# EAGLE board contra1575 (EAGLE 7.5.0)

Size 160 x 100 mm. Coordinates in mm from the lower left corner, seen from the top.
Outline: 0,0 160,0 160,100 0,100 0,0
Copper layers (1*16): Top 0.035mm / dielectric 1.5mm / Bottom 0.035mm
Design rules "default": minimum track width 10mil, minimum drill 24mil, track to track 8mil, track to pad 8mil, pad to pad 8mil, via to via 8mil, smd to smd 8mil, copper to edge 40mil, drill to drill 8mil, minimum pad ring 10mil, minimum via ring 8mil, stop-mask expansion 4mil, vias tented up to drill 0mil, thermal gap 10mil

## Footprints (pad centres in the part's own frame; a part is rotated, then mirrored left to right if it is on the bottom)
5MM_TH = drill 0.7 pad 2.54: 1 -2.5,0; 2 2.5,0
DO35-7 = drill 0.813 pad 2.184: A 3.81,0; C -3.81,0
44PINEDGE = smd 1.905 x 8.255: 1 -41.605,4.826; 2 -37.643,4.826; 3 -33.68,4.826; 4 -29.718,4.826; 5 -25.756,4.826; 6 -21.793,4.826; 7 -17.831,4.826; 8 -13.868,4.826; 9 -9.906,4.826; 10 -5.944,4.826; 11 -1.981,4.826; 12 1.981,4.826; 13 5.944,4.826; 14 9.906,4.826; 15 13.868,4.826; 16 17.831,4.826; 17 21.793,4.826; 18 25.756,4.826; 19 29.718,4.826; 20 33.68,4.826; 21 37.643,4.826; 22 41.605,4.826 | smd 1.905 x 8.255 bottom: A -41.605,4.826; B -37.643,4.826; C -33.68,4.826; D -29.718,4.826; E -25.756,4.826; F -21.793,4.826; H -17.831,4.826; J -13.868,4.826; K -9.906,4.826; L -5.944,4.826; M -1.981,4.826; N 1.981,4.826; P 5.944,4.826; R 9.906,4.826; S 13.868,4.826; T 17.831,4.826; U 21.793,4.826; V 25.756,4.826; W 29.718,4.826; X 33.68,4.826; Y 37.643,4.826; Z 41.605,4.826
TO92 = drill 0.813 octagon: 1 1.27,-1.27; 2 1.27,1.27; 3 -1.27,1.27
TO18 = drill 0.813 pad 1.676: 1 1.905,0; 2 0,1.905; 3 -1.905,0
R_QUARTERWATT = drill 0.813 pad 1.676: 1 -4.5,0; 2 4.5,0
R_HALFWATT = drill 0.9 pad 2.184: 1 -5.85,0; 2 5.85,0
R_ONEWATT = drill 1 pad 2.184: 1 -8,0; 2 8,0
R_TWOWATT = drill 1 pad 2.184: 1 -8.75,0; 2 8.75,0

## Placement (x,y rotation side)
C1  .01uF  [5MM_TH]  -109.22,34.29 0 top  (outside the outline)
C2  .01uF  [5MM_TH]  -17.78,46.99 0 top  (outside the outline)
C3  1000pF  [5MM_TH]  -76.2,34.29 0 top  (outside the outline)
C4  330pF  [5MM_TH]  -87.63,34.29 0 top  (outside the outline)
C5  330pF  [5MM_TH]  -99.06,34.29 0 top  (outside the outline)
C6  47p  [5MM_TH]  -27.94,46.99 0 top  (outside the outline)
C7  47p  [5MM_TH]  -38.1,46.99 0 top  (outside the outline)
C8  68p  [5MM_TH]  -48.26,46.99 0 top  (outside the outline)
C9  .01uF  [5MM_TH]  -58.42,46.99 0 top  (outside the outline)
C10  .01uF  [5MM_TH]  -68.58,46.99 0 top  (outside the outline)
D1  BAT42  [DO35-7]  -48.26,97.79 0 top  (outside the outline)
D2  BAT42  [DO35-7]  -60.96,97.79 0 top  (outside the outline)
D3  1N4148  [DO35-7]  -21.59,97.79 0 top  (outside the outline)
D4  BAT42  [DO35-7]  -73.66,97.79 0 top  (outside the outline)
D5  1N4148  [DO35-7]  -35.56,97.79 0 top  (outside the outline)
P1  44PINEDGE  [44PINEDGE]  -68.58,1.27 0 top  (outside the outline)
Q1  2N3906  [TO92]  -104.14,78.74 0 top  (outside the outline)
Q2  2N3906  [TO92]  -17.78,88.9 0 top  (outside the outline)
Q3  2N2907  [TO18]  -71.12,106.68 0 top  (outside the outline)
Q4  2N2907  [TO18]  -90.17,106.68 0 top  (outside the outline)
Q6  2N3904  [TO92]  -25.4,88.9 0 top  (outside the outline)
Q7  2N3906  [TO92]  -33.02,88.9 0 top  (outside the outline)
Q8  2N3904  [TO92]  -40.64,88.9 0 top  (outside the outline)
Q9  2N3904  [TO92]  -48.26,88.9 0 top  (outside the outline)
Q10  2N3904  [TO92]  -55.88,88.9 0 top  (outside the outline)
Q11  2N3904  [TO92]  -63.5,88.9 0 top  (outside the outline)
Q12  2N3904  [TO92]  -71.12,88.9 0 top  (outside the outline)
Q13  2N2222A  [TO18]  -96.52,97.79 0 top  (outside the outline)
Q14  KSP05TA  [TO92]  -87.63,78.74 0 top  (outside the outline)
Q16  KSP05TA  [TO92]  -96.52,78.74 0 top  (outside the outline)
Q17  2N3906  [TO92]  -78.74,88.9 0 top  (outside the outline)
Q18  2N3904  [TO92]  -86.36,88.9 0 top  (outside the outline)
Q19  2N3904  [TO92]  -93.98,88.9 0 top  (outside the outline)
Q20  2N3904  [TO92]  -101.6,88.9 0 top  (outside the outline)
Q21  2N2222A  [TO18]  -30.48,106.68 0 top  (outside the outline)
Q22  2N2222A  [TO18]  -52.07,106.68 0 top  (outside the outline)
R1  120  [R_QUARTERWATT]  -19.05,58.42 0 top  (outside the outline)
R2  120  [R_QUARTERWATT]  -30.48,58.42 0 top  (outside the outline)
R3  560  [R_QUARTERWATT]  -41.91,58.42 0 top  (outside the outline)
R5  27  [R_QUARTERWATT]  -53.34,58.42 0 top  (outside the outline)
R6  120  [R_QUARTERWATT]  -64.77,58.42 0 top  (outside the outline)
R7  1K  [R_HALFWATT]  -81.28,45.72 0 top  (outside the outline)
R8  27  [R_QUARTERWATT]  -76.2,58.42 0 top  (outside the outline)
R9  27  [R_QUARTERWATT]  -87.63,58.42 0 top  (outside the outline)
R10  120  [R_QUARTERWATT]  -99.06,58.42 0 top  (outside the outline)
R11  1K  [R_ONEWATT]  -83.82,21.59 0 top  (outside the outline)
R12  1K  [R_QUARTERWATT]  -19.05,68.58 0 top  (outside the outline)
R13  560  [R_TWOWATT]  -22.86,21.59 0 top  (outside the outline)
R14  120  [R_QUARTERWATT]  -30.48,68.58 0 top  (outside the outline)
R15  120  [R_QUARTERWATT]  -41.91,68.58 0 top  (outside the outline)
R16  120  [R_QUARTERWATT]  -53.34,68.58 0 top  (outside the outline)
R17  560  [R_TWOWATT]  -43.18,21.59 0 top  (outside the outline)
R18  560  [R_ONEWATT]  -102.87,21.59 0 top  (outside the outline)
R19  560  [R_ONEWATT]  -22.86,34.29 0 top  (outside the outline)
R20  1K  [R_ONEWATT]  -41.91,34.29 0 top  (outside the outline)
R21  1K  [R_ONEWATT]  -60.96,34.29 0 top  (outside the outline)
R22  180  [R_HALFWATT]  -96.52,45.72 0 top  (outside the outline)
R23  560  [R_TWOWATT]  -63.5,21.59 0 top  (outside the outline)
R24  680  [R_QUARTERWATT]  -64.77,68.58 0 top  (outside the outline)
R25  20K  [R_QUARTERWATT]  -76.2,68.58 0 top  (outside the outline)
R27  680  [R_QUARTERWATT]  -87.63,68.58 0 top  (outside the outline)
R28  120  [R_QUARTERWATT]  -99.06,68.58 0 top  (outside the outline)
R29  27  [R_QUARTERWATT]  -19.05,78.74 0 top  (outside the outline)
R30  1.5K  [R_QUARTERWATT]  -30.48,78.74 0 top  (outside the outline)
R31  120  [R_QUARTERWATT]  -41.91,78.74 0 top  (outside the outline)
R32  330  [R_QUARTERWATT]  -53.34,78.74 0 top  (outside the outline)
R33  27  [R_QUARTERWATT]  -64.77,78.74 0 top  (outside the outline)
R34  27  [R_QUARTERWATT]  -76.2,78.74 0 top  (outside the outline)

## Library data of the parts
C1-C10 D1-D5 P1 Q1-Q4 Q6-Q14 Q16-Q22 R1-R3 R5-R25 R27-R34 = keiths

## Nets
+10V: P1.A R2.1 R5.1 R9.1 R11.1 R13.1 R17.1 R18.1 R21.1 R22.1 R28.1 R30.1 R32.1
-15V: P1.C Q10.1 Q11.1 Q12.1 R3.2 R6.2 R8.2 R19.2 R23.2 R25.2 R29.2 R31.2 R33.2 R34.2
GATE: P1.K R10.2
GND: C1.2 C2.2 C7.2 C8.2 C9.2 C10.2 P1.D R7.1
N$1: D3.C D4.A Q12.2
N$3: C4.2 C5.2 D3.A R18.2 R19.1
N$4: Q9.1 R8.1
N$5: Q13.3 R22.2
N$6: C6.2 R15.1 R16.1 R20.1
N$7: Q3.1 Q4.3 Q14.1 Q16.3
N$8: C7.1 C8.1 Q14.3 Q16.1 Q19.2
N$9: C6.1 D4.C Q12.3 R20.2 R21.2
N$10: Q14.2 R24.2
N$11: Q16.2 R27.1
N$12: D5.A Q17.1 R24.1 R27.2
N$13: Q17.3 R28.2
N$14: Q2.2 Q4.2 Q6.3 Q7.1 Q7.2 Q17.2
N$16: D2.A Q11.2 R16.2
N$17: D5.C Q13.1 R23.1
N$18: Q19.1 Q20.3 Q21.2
N$19: Q6.1 R34.1
N$20: C10.1 Q21.3 R32.2
N$21: C9.1 Q19.3 R30.2
N$22: D2.C Q11.3 Q13.2 R17.2 R25.1
N$23: Q22.1 R33.1
N$24: Q20.1 R31.1
N$25: Q18.1 R29.1
N$27: C3.2 R14.1
N$29: D1.A Q10.2 R14.2 R15.2
N$30: C4.1 C5.1 D1.C Q10.3 R13.2
N$31: C3.1 Q9.3 R12.2
N$32: Q7.3 R9.2
N$33: Q8.1 R12.1
N$34: C1.1 Q1.1 R3.1
N$35: Q6.2 Q9.2 Q18.2 Q18.3 Q20.2 Q22.2 R7.2
N$37: Q8.2 R10.1
N$38: Q8.3 R11.2
N$40: C2.1 Q3.3 R6.1
N$42: Q4.1 R5.2
N$43: Q1.3 Q2.1 Q3.2
N$44: Q2.3 R2.2
N$45: Q1.2 R1.2
SIGNAL_IN: P1.E R1.1
SIGNAL_OUT: P1.Z Q21.1 Q22.3

## Tracks (layer width: path | path; a pad name or v marks a point on that pad's centre or on a via)
+10V  (12 unrouted)
-15V  (13 unrouted)
GATE  (1 unrouted)
GND  (7 unrouted)
N$1  (2 unrouted)
N$3  (4 unrouted)
N$4  (1 unrouted)
N$5  (1 unrouted)
N$6  (3 unrouted)
N$7  (3 unrouted)
N$8  (4 unrouted)
N$9  (4 unrouted)
N$10  (1 unrouted)
N$11  (1 unrouted)
N$12  (3 unrouted)
N$13  (1 unrouted)
N$14  (5 unrouted)
N$16  (2 unrouted)
N$17  (2 unrouted)
N$18  (2 unrouted)
N$19  (1 unrouted)
N$20  (2 unrouted)
N$21  (2 unrouted)
N$22  (4 unrouted)
N$23  (1 unrouted)
N$24  (1 unrouted)
N$25  (1 unrouted)
N$27  (1 unrouted)
N$29  (3 unrouted)
N$30  (4 unrouted)
N$31  (2 unrouted)
N$32  (1 unrouted)
N$33  (1 unrouted)
N$34  (2 unrouted)
N$35  (6 unrouted)
N$37  (1 unrouted)
N$38  (1 unrouted)
N$40  (2 unrouted)
N$42  (1 unrouted)
N$43  (2 unrouted)
N$44  (1 unrouted)
N$45  (1 unrouted)
SIGNAL_IN  (1 unrouted)
SIGNAL_OUT  (2 unrouted)